# Altium PCB zb_hub.PcbDoc
Units mil, origin at the board's own origin, x right, y up, seen from the top; angles counter-clockwise.
Board outline 3850 x 3025 mil, 2 copper layers (Top Layer, Bottom Layer); 24 components, 15 nets, 284 pads, 0 vias.
Unrouted connection lines stored in the file: 4.
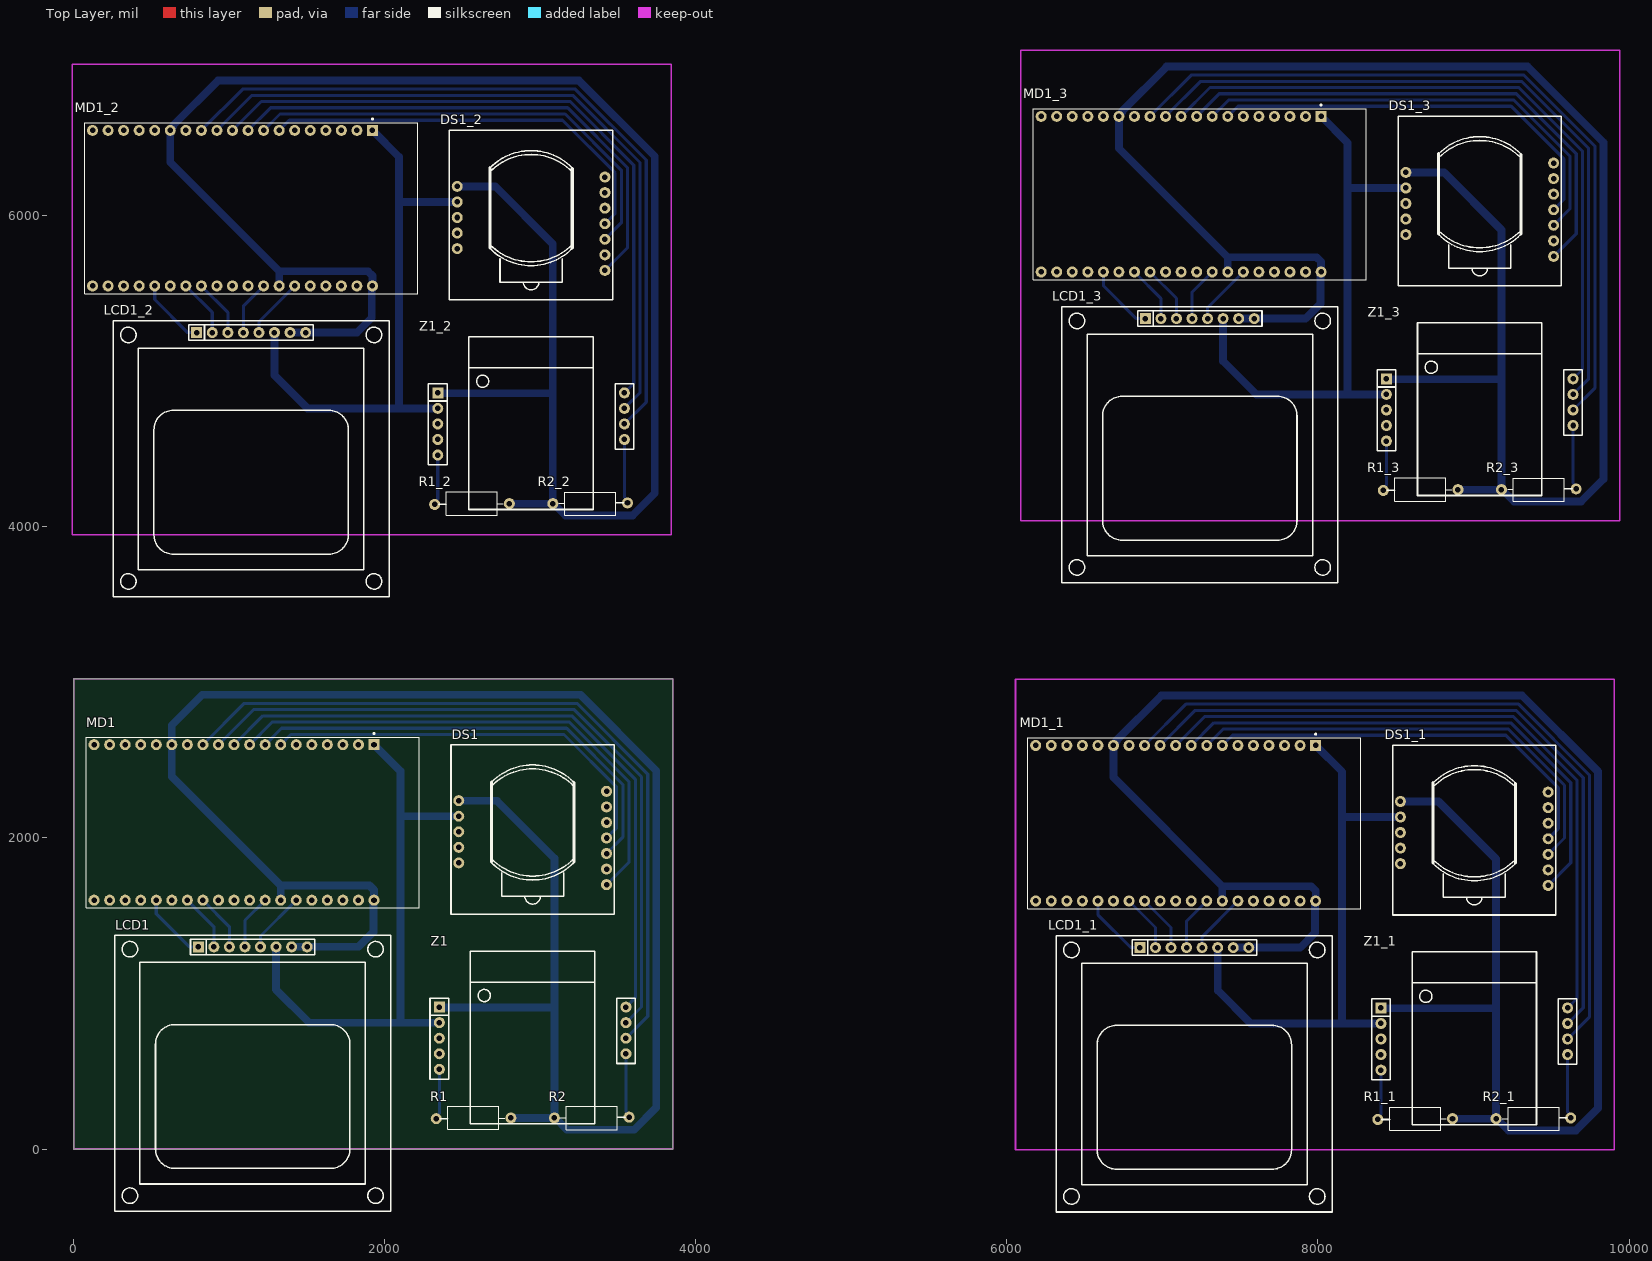
[diagram p0: Top Layer view]
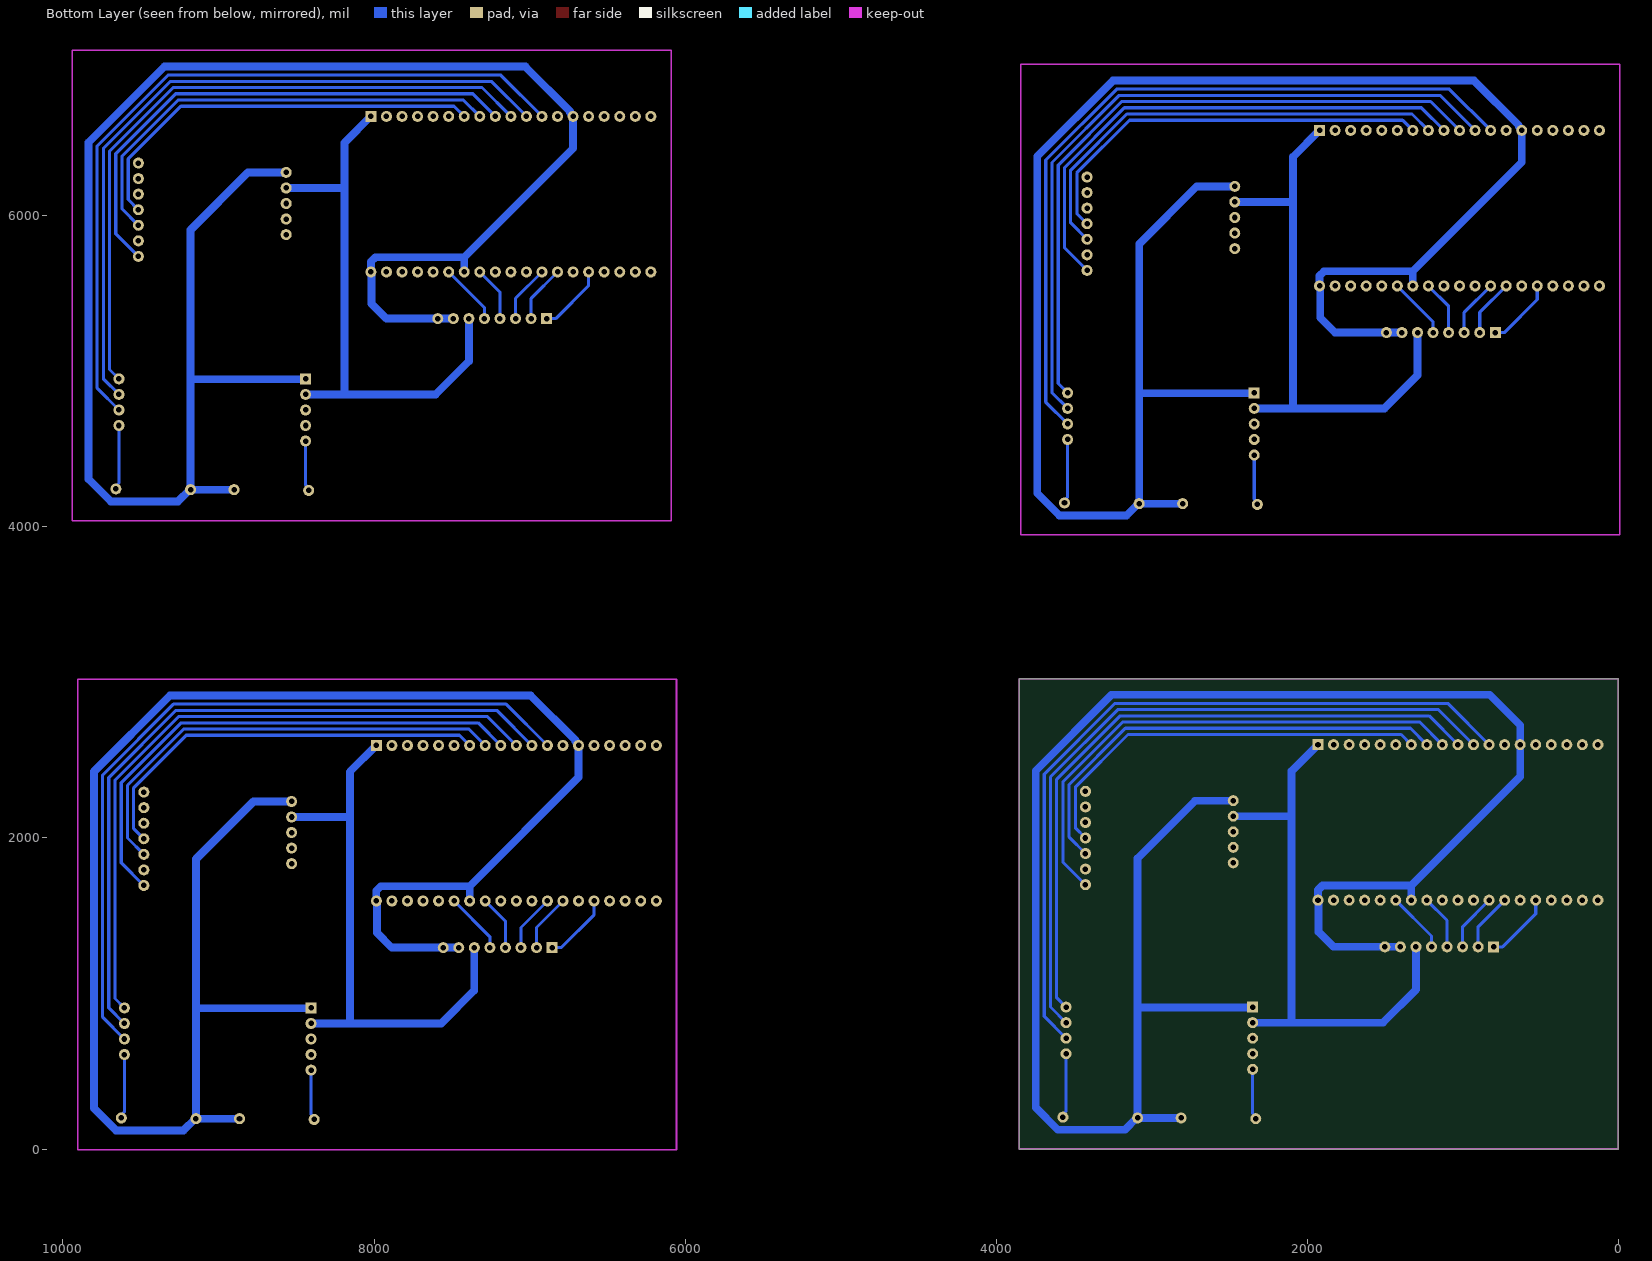
[diagram p1: Bottom Layer view, seen from below]

## Layer stack, top to bottom
Top Solder: solder mask 0.4, Solder Resist, Dk 3.5
Top Layer: signal copper 1.4
Dielectric 1: dielectric 12.6, FR-4, Dk 4.8
Bottom Layer: signal copper 1.4
Bottom Solder: solder mask 0.4, Solder Resist, Dk 3.5

## Board outline
0,0 0,3025 3850,3025 3850,0

## Design rules (kind name [scope] priority, off if disabled: settings)
Clearance [All] p1: gap=20 ignorepadtopadclearanceinfootprint=TRUE
ComponentClearance [All] p1: gap=0 collisioncheckmode=3 verticalgap=0 showdistances=FALSE
HoleSize [All] p1: absolutevalues=TRUE maxlimit=150 minlimit=1 maxpercent=80.000 minpercent=20.000
MinimumSolderMaskSliver [All] p1: minsoldermaskwidth=1
PolygonConnect [All] p1: connectstyle=Relief reliefconductorwidth=10 reliefentries=4 polygonreliefangle="90 Angle" airgapwidth=10
RoutingVias [All] p1: holewidth=10 width=20 viastyle="Through Hole" minholewidth=5 minwidth=10 maxholewidth=20 maxwidth=50
SilkToSilkClearance [All] p1: silktosilkclearance=5
SilkToSolderMaskClearance [IsPad] p1: minsilkscreentomaskgap=5 clearancetoexposedcopper=TRUE
SolderMaskExpansion [All] p1: expansion=4 istentingtop=FALSE
Width [All] p1: maxlimit=50 minlimit=10 preferedwidth=20
25 further rules are at their usual default settings.

## Classes and differential pairs
component class zb_hub: DS1 LCD1 MD1 R1 R2 Z1

## Components (designator, comment, footprint, x,y, rotation, side; value= is the part's Value field where it differs from the comment)
DS1 "DS1307" DS1307 2950,2000 r180 top
DS1_1 "DS1307" DS1307 9005,1995 r180 top (schematic designator DS1)
DS1_2 "DS1307" DS1307 2940,5950 r180 top (schematic designator DS1)
DS1_3 "DS1307" DS1307 9040,6040 r180 top (schematic designator DS1)
LCD1 "LCD5110" LCD5110 1150,1300 r0 top
LCD1_1 "LCD5110" LCD5110 7205,1295 r0 top (schematic designator LCD1)
LCD1_2 "LCD5110" LCD5110 1140,5250 r0 top (schematic designator LCD1)
LCD1_3 "LCD5110" LCD5110 7240,5340 r0 top (schematic designator LCD1)
MD1 "ESP32-DevKitC V4" FP-ESP32-DevKitC_V4-MFG 1150,2100 r270 top
MD1_1 "ESP32-DevKitC V4" FP-ESP32-DevKitC_V4-MFG 7205,2095 r270 top (schematic designator MD1)
MD1_2 "ESP32-DevKitC V4" FP-ESP32-DevKitC_V4-MFG 1140,6050 r270 top (schematic designator MD1)
MD1_3 "ESP32-DevKitC V4" FP-ESP32-DevKitC_V4-MFG 7240,6140 r270 top (schematic designator MD1)
R1 "10K" RES-1/2W 2550,200 r0 top
R1_1 "10K" RES-1/2W 8605,195 r0 top (schematic designator R1)
R1_2 "10K" RES-1/2W 2540,4150 r0 top (schematic designator R1)
R1_3 "10K" RES-1/2W 8640,4240 r0 top (schematic designator R1)
R2 "10K" RES-1/2W 3350,200 r180 top
R2_1 "10K" RES-1/2W 9405,195 r180 top (schematic designator R2)
R2_2 "10K" RES-1/2W 3340,4150 r180 top (schematic designator R2)
R2_3 "10K" RES-1/2W 9440,4240 r180 top (schematic designator R2)
Z1 "SZ1V5" "SZ1V5 PINOUT MODULE" 2950,600 r0 top
Z1_1 "SZ1V5" "SZ1V5 PINOUT MODULE" 9005,595 r0 top (schematic designator Z1)
Z1_2 "SZ1V5" "SZ1V5 PINOUT MODULE" 2940,4550 r0 top (schematic designator Z1)
Z1_3 "SZ1V5" "SZ1V5 PINOUT MODULE" 9040,4640 r0 top (schematic designator Z1)

## Footprints (in the part's own frame and the unit in brackets; to place one, negate y for a bottom-side part, rotate by r counter-clockwise, add the part's x,y. Pads: shape width x height; smd on the part's side, far side on the other; paste and mask are expansions set on the pad)
DS1307 [mm]
  round 1.8 hole 0.9: 1(-12.065,7.62) 2(-12.065,5.08) 2(12.065,4.064) 3(-12.065,2.54) 3(12.065,1.524) 4(-12.065,0) 4(12.065,-1.016) 5(-12.065,-2.54) 5(12.065,-3.556) 6(-12.065,-5.08) 6(12.065,-6.096) 7(-12.065,-7.62)
  silkscreen extent -13.34,-15.24 13.34,12.45
FP-ESP32-DevKitC_V4-MFG [mm]
  rect 1.8x1.8 hole 0.9 paste-1000 mask+0: 1(-12.7,19.81)
  round 1.8 hole 0.9 paste-1000 mask+0: 2(-12.7,17.27) 3(-12.7,14.73) 4(-12.7,12.19) 5(-12.7,9.65) 6(-12.7,7.11) 7(-12.7,4.57) 8(-12.7,2.03) 9(-12.7,-0.51) 10(-12.7,-3.05) 11(-12.7,-5.59) 12(-12.7,-8.13) 13(-12.7,-10.67) 14(-12.7,-13.21) 15(-12.7,-15.75) 16(-12.7,-18.29) 17(-12.7,-20.83) 18(-12.7,-23.37) 19(-12.7,-25.91) 20(12.7,-25.91) 21(12.7,-23.37) 22(12.7,-20.83) 23(12.7,-18.29) 24(12.7,-15.75) 25(12.7,-13.21) 26(12.7,-10.67) 27(12.7,-8.13) 28(12.7,-5.59) 29(12.7,-3.05) 30(12.7,-0.51) 31(12.7,2.03) 32(12.7,4.57) 33(12.7,7.11) 34(12.7,9.65) 35(12.7,12.19) 36(12.7,14.73) 37(12.7,17.27) 38(12.7,19.81)
  silkscreen extent -14.67,-27.2 13.95,27.2, body extent -14.05,-27.3 14.05,27.3, height 0.25
LCD5110 [mm]
  rect 1.8x1.8 hole 0.9: 1(-8.89,0)
  round 1.8 hole 0.9: 2(-6.35,0) 3(-3.81,0) 4(-1.27,0) 5(1.27,0) 6(3.81,0) 7(6.35,0) 8(8.89,0)
  silkscreen extent -22.54,-43.18 22.54,1.91
RES-1/2W [mm]
  round 1.8 hole 0.9: 1(-5.588,-0.127) 2(6.604,0)
  silkscreen extent -4.95,-1.87 5.61,1.91, body extent -5.84,-1.52 6.86,1.43, height 3.08
"SZ1V5 PINOUT MODULE" [mm]
  rect 1.8x1.8 hole 0.9: 1(-15.24,7.938)
  round 1.8 hole 0.9: 3(-15.24,5.397) 5(-15.24,2.857) 6(-15.24,0.318) 7(-15.24,-2.222) 13(15.24,7.938) 16(15.24,5.397) 17(15.24,2.857) 24(15.24,0.318)
  silkscreen extent -16.76,-11.11 16.76,17.08

## Part data
DS1 DS1_1 DS1_2 DS1_3: "Tiny RTC I2C module DS1307"
LCD1 LCD1_1 LCD1_2 LCD1_3: "IC Philips PCD8544. 3V~5V, 84×48 pixels"
MD1 MD1_1 MD1_2 MD1_3: library part CMP-194065-000004-1, "WiFi Development Tools (802.11) ESP32 General Development Kit, ESP32-WROOM-32 on the board", Manufacturer=Espressif, Max Frequency=2.5GHz, Max Supply Voltage=5V, Min Supply Voltage=2.7V, Temperature="-40°C to", Temperature Range Low=-40°C, Automotive=No, Bandwidth=2.4-2.5GHz, Category=UNK, ComponentLink2Description=Datasheet, ComponentLink2URL=https://docs.espressif.com/projects/esp-idf/en/latest/get-started/get-started-devkitc.html, Device Class L1="Integrated Circuits (ICs)", Device Class L2="RF Semiconductors and Devices", Device Class L3=Transceivers, Interface=I2C,SPI,UART,I2S, Lead Free=Yes, Manufacturer Part Number="ESP32-DevKitC V4", Number Of Adc Channels=16, Number Of Gpio=22, Octopart=https://octopart.com/esp32-devkitc+v4-espressif+systems-107467262, Package="ESP32-DevKitC V4", RoHS=TRUE
R1 R1_1 R1_2 R1_3 R2 R2_1 R2_2 R2_3: library part Res, "Res", Manufacturer="Generic Components", Class=Passive, Published=08/06/2000, Publisher="Altium Hobart Technology Centre", SubClass=R
Z1 Z1_1 Z1_2 Z1_3: library part SZ1V5_Alt

## Nets (pads, with @x,y where several pads share a name; then routed paths per layer and width w, separated by ;. In a path a pad name is that pad's centre, name@x,y a point inside that pad or via, vN(x,y) a via of type N, cw(c..) or ccw(c..) an arc to the next point about the centre after c; other vN are vias at no path point)
+3: DS1.5 LCD1.6 MD1.1 MD1.19 Z1.3 | length 3646
  Bottom Layer w50: LCD1.6 1300,1025 1512.5,812.5 2100,812.5 ; MD1.1 2100,2429.92 2100,2140 ; Z1.3 2100,812.5 ; DS1.5@2475,2140 2100,2140 ; 2100,812.5 2100,2140
GND: DS1.6 LCD1.7 LCD1.8 MD1.14 MD1.32 MD1.38 R1.2 R2.2 Z1.1 | length 12633.5
  Bottom Layer w50: MD1.32 1329.92,1695 ; LCD1.7 LCD1.8 1830,1300 1925.93,1395.93 1925.93,1596.01 MD1.38 1929.92,1665.71 1900.63,1695 1329.92,1695 ; Z1.1 2352.5,910 3090,910 ; DS1.6@2475,2240 2720,2240 3090,1870 3090,910 ; R1.2 R2.2 ; 1329.92,1695 629.92,2395 629.92,2724.92 825.43,2920.43 3257.73,2920.43 3745.43,2432.73 3745.43,266.68 3603.32,124.57 3170.74,124.57 3095.31,200 R2.2 ; R2.2 3090,910
LCD_CE: LCD1.2 MD1.26 | length 370.4
  Bottom Layer w20: MD1.26 900,1429.92 LCD1.2
LCD_DC: LCD1.3 MD1.27 | length 370.4
  Bottom Layer w20: MD1.27 1000,1429.92 LCD1.3
LCD_RST: LCD1.1 MD1.24 | length 445.6
  Bottom Layer w20: MD1.24 529.92,1512.52 742.44,1300 LCD1.1
MOSI: LCD1.4 MD1.31 | length 353.8
  Bottom Layer w20: LCD1.4 1100,1470.08 MD1.31
NetR1_1: R1.1 Z1.7 | length 325.8
  Bottom Layer w20: R1.1 2330,208.76 2350,228.76 Z1.7
NetR2_1: R2.1 Z1.24 | length 415.8
  Bottom Layer w20: Z1.24 3550,242.59 3570,222.59 R2.1
RTC_SCL: DS1.3 MD1.8 | length 2981.4
  Bottom Layer w20: MD1.8 1335.35,2705.43 3168.67,2705.43 3530.43,2343.67 3530.43,2005.43 DS1.3@3425,1900
RTC_SDA: DS1.4 MD1.7 | length 2682
  Bottom Layer w20: MD1.7 1395.35,2665.43 3152.1,2665.43 3490.43,2327.1 3490.43,2065.43 DS1.4@3425,2000
RTC_SQ: DS1.1 MD1.9 | length 3380.8
  Bottom Layer w20: MD1.9 1275.35,2745.43 3185.24,2745.43 3570.43,2360.24 3570.43,1845.43 DS1.1
SCLK: LCD1.5 MD1.33 | length 395.2
  Bottom Layer w20: LCD1.5 1200,1370.08 MD1.33
Z_RST: MD1.10 Z1.13 | length 4315.9
  Bottom Layer w20: MD1.10 1215.35,2785.43 3201.81,2785.43 3610.43,2376.81 3610.43,972.93 Z1.13
Z_RX: MD1.11 Z1.16 | length 4615.3
  Bottom Layer w20: MD1.11 1155.35,2825.43 3218.38,2825.43 3650.43,2393.38 3650.43,912.93 Z1.16
Z_TX: MD1.12 Z1.17 | length 4914.7
  Bottom Layer w20: MD1.12 1095.35,2865.43 3234.95,2865.43 3690.43,2409.95 3690.43,852.93 Z1.17
pads on no net: DS1.2 DS1.7 DS1_1.1 DS1_1.2 DS1_1.3 DS1_1.4 DS1_1.5 DS1_1.6 DS1_1.7 DS1_2.1 DS1_2.2 DS1_2.3 DS1_2.4 DS1_2.5 DS1_2.6 DS1_2.7 DS1_3.1 DS1_3.2 DS1_3.3 DS1_3.4 DS1_3.5 DS1_3.6 DS1_3.7 LCD1_1.1 LCD1_1.2 LCD1_1.3 LCD1_1.4 LCD1_1.5 LCD1_1.6 LCD1_1.7 LCD1_1.8 LCD1_2.1 LCD1_2.2 LCD1_2.3 LCD1_2.4 LCD1_2.5 LCD1_2.6 LCD1_2.7 LCD1_2.8 LCD1_3.1 LCD1_3.2 LCD1_3.3 LCD1_3.4 LCD1_3.5 LCD1_3.6 LCD1_3.7 LCD1_3.8 MD1.2 MD1.3 MD1.4 MD1.5 MD1.6 MD1.13 MD1.15 MD1.16 MD1.17 MD1.18 MD1.20 MD1.21 MD1.22 MD1.23 MD1.25 MD1.28 MD1.29 MD1.30 MD1.34 MD1.35 MD1.36 MD1.37 MD1_1.1 MD1_1.2 MD1_1.3 MD1_1.4 MD1_1.5 MD1_1.6 MD1_1.7 MD1_1.8 MD1_1.9 MD1_1.10 MD1_1.11 MD1_1.12 MD1_1.13 MD1_1.14 MD1_1.15 MD1_1.16 MD1_1.17 MD1_1.18 MD1_1.19 MD1_1.20 MD1_1.21 MD1_1.22 MD1_1.23 MD1_1.24 MD1_1.25 MD1_1.26 MD1_1.27 MD1_1.28 MD1_1.29 MD1_1.30 MD1_1.31 MD1_1.32 MD1_1.33 MD1_1.34 MD1_1.35 MD1_1.36 MD1_1.37 MD1_1.38 MD1_2.1 MD1_2.2 MD1_2.3 MD1_2.4 MD1_2.5 MD1_2.6 MD1_2.7 MD1_2.8 MD1_2.9 MD1_2.10 MD1_2.11 MD1_2.12 MD1_2.13 MD1_2.14 MD1_2.15 MD1_2.16 MD1_2.17 MD1_2.18 MD1_2.19 MD1_2.20 MD1_2.21 MD1_2.22 MD1_2.23 MD1_2.24 MD1_2.25 MD1_2.26 MD1_2.27 MD1_2.28 MD1_2.29 MD1_2.30 MD1_2.31 MD1_2.32 MD1_2.33 MD1_2.34 MD1_2.35 MD1_2.36 MD1_2.37 MD1_2.38 MD1_3.1 MD1_3.2 MD1_3.3 MD1_3.4 MD1_3.5 MD1_3.6 MD1_3.7 MD1_3.8 MD1_3.9 MD1_3.10 MD1_3.11 MD1_3.12 MD1_3.13 MD1_3.14 MD1_3.15 MD1_3.16 MD1_3.17 MD1_3.18 MD1_3.19 MD1_3.20 MD1_3.21 MD1_3.22 MD1_3.23 MD1_3.24 MD1_3.25 MD1_3.26 MD1_3.27 MD1_3.28 MD1_3.29 MD1_3.30 MD1_3.31 MD1_3.32 MD1_3.33 MD1_3.34 MD1_3.35 MD1_3.36 MD1_3.37 MD1_3.38 R1_1.1 R1_1.2 R1_2.1 R1_2.2 R1_3.1 R1_3.2 R2_1.1 R2_1.2 R2_2.1 R2_2.2 R2_3.1 R2_3.2 Z1.5 Z1.6 Z1_1.1 Z1_1.3 Z1_1.5 Z1_1.6 Z1_1.7 Z1_1.13 Z1_1.16 Z1_1.17 Z1_1.24 Z1_2.1 Z1_2.3 Z1_2.5 Z1_2.6 Z1_2.7 Z1_2.13 Z1_2.16 Z1_2.17 Z1_2.24 Z1_3.1 Z1_3.3 Z1_3.5 Z1_3.6 Z1_3.7 Z1_3.13 Z1_3.16 Z1_3.17 Z1_3.24
copper on no net: | length 125344.7
  Bottom Layer w20: 519.92,5550 519.92,5462.52 732.44,5250 790,5250 ; 719.92,5550 890,5379.92 890,5250 ; 819.92,5550 990,5379.92 990,5250 ; 819.92,6550 1085.35,6815.43 3224.95,6815.43 3680.43,6359.95 3680.43,4802.93 3540,4662.5 ; 919.92,6550 1145.35,6775.43 3208.38,6775.43 3640.43,6343.38 3640.43,4862.93 3540,4762.5 ; 1019.92,6550 1205.35,6735.43 3191.81,6735.43 3600.43,6326.81 3600.43,4922.93 3540,4862.5 ; 1090,5250 1090,5420.08 1219.92,5550 ; 1119.92,6550 1265.35,6695.43 3175.24,6695.43 3560.43,6310.24 3560.43,5795.43 3415,5650 ; 1190,5250 1190,5320.08 1419.92,5550 ; 1219.92,6550 1325.35,6655.43 3158.67,6655.43 3520.43,6293.67 3520.43,5955.43 3415,5850 ; 1319.92,6550 1385.35,6615.43 3142.1,6615.43 3480.43,6277.1 3480.43,6015.43 3415,5950 ; 2320,4145 2320,4158.76 2340,4178.76 2340,4462.5 ; 3540,4562.5 3540,4192.59 3560,4172.59 3560,4155 ; 6584.92,1595 6584.92,1507.52 6797.44,1295 6855,1295 ; 6619.92,5640 6619.92,5552.52 6832.44,5340 6890,5340 ; 6784.92,1595 6955,1424.92 6955,1295 ; 6819.92,5640 6990,5469.92 6990,5340 ; 6884.92,1595 7055,1424.92 7055,1295 ; 6884.92,2595 7150.35,2860.43 9289.95,2860.43 9745.43,2404.95 9745.43,847.93 9605,707.5 ; 6919.92,5640 7090,5469.92 7090,5340 ; 6919.92,6640 7185.35,6905.43 9324.95,6905.43 9780.43,6449.95 9780.43,4892.93 9640,4752.5 ; 6984.92,2595 7210.35,2820.43 9273.38,2820.43 9705.43,2388.38 9705.43,907.93 9605,807.5 ; 7019.92,6640 7245.35,6865.43 9308.38,6865.43 9740.43,6433.38 9740.43,4952.93 9640,4852.5 ; 7084.92,2595 7270.35,2780.43 9256.81,2780.43 9665.43,2371.81 9665.43,967.93 9605,907.5 ; 7119.92,6640 7305.35,6825.43 9291.81,6825.43 9700.43,6416.81 9700.43,5012.93 9640,4952.5 ; 7155,1295 7155,1465.08 7284.92,1595 ; 7184.92,2595 7330.35,2740.43 9240.24,2740.43 9625.43,2355.24 9625.43,1840.43 9480,1695 ; 7190,5340 7190,5510.08 7319.92,5640 ; 7219.92,6640 7365.35,6785.43 9275.24,6785.43 9660.43,6400.24 9660.43,5885.43 9515,5740 ; 7255,1295 7255,1365.08 7484.92,1595 ; 7284.92,2595 7390.35,2700.43 9223.67,2700.43 9585.43,2338.67 9585.43,2000.43 9480,1895 ; 7290,5340 7290,5410.08 7519.92,5640 ; 7319.92,6640 7425.35,6745.43 9258.67,6745.43 9620.43,6383.67 9620.43,6045.43 9515,5940 ; 7384.92,2595 7450.35,2660.43 9207.1,2660.43 9545.43,2322.1 9545.43,2060.43 9480,1995 ; 7419.92,6640 7485.35,6705.43 9242.1,6705.43 9580.43,6367.1 9580.43,6105.43 9515,6040 ; 8385,190 8385,203.76 8405,223.76 8405,507.5 ; 8420,4235 8420,4248.76 8440,4268.76 8440,4552.5 ; 9605,607.5 9605,237.59 9625,217.59 9625,200 ; 9640,4652.5 9640,4282.59 9660,4262.59 9660,4245
  Bottom Layer w50: 1290,5250 1290,4975 1502.5,4762.5 2090,4762.5 ; 1319.92,5550 1319.92,5645 ; 1390,5250 1490,5250 1820,5250 1915.93,5345.93 1915.93,5546.01 1919.92,5550 1919.92,5615.71 1890.63,5645 1319.92,5645 ; 1919.92,6550 2090,6379.92 2090,6090 ; 2340,4762.5 2090,4762.5 ; 2340,4862.5 2342.5,4860 3080,4860 ; 2465,6090 2090,6090 ; 2465,6190 2710,6190 3080,5820 3080,4860 ; 2800,4150 3080,4150 ; 7355,1295 7355,1020 7567.5,807.5 8155,807.5 ; 7384.92,1595 7384.92,1690 ; 7390,5340 7390,5065 7602.5,4852.5 8190,4852.5 ; 7419.92,5640 7419.92,5735 ; 7455,1295 7555,1295 7885,1295 7980.93,1390.93 7980.93,1591.01 7984.92,1595 7984.92,1660.71 7955.63,1690 7384.92,1690 ; 7490,5340 7590,5340 7920,5340 8015.93,5435.93 8015.93,5636.01 8019.92,5640 8019.92,5705.71 7990.63,5735 7419.92,5735 ; 7984.92,2595 8155,2424.92 8155,2135 ; 8019.92,6640 8190,6469.92 8190,6180 ; 8405,807.5 8155,807.5 ; 8405,907.5 8407.5,905 9145,905 ; 8440,4852.5 8190,4852.5 ; 8440,4952.5 8442.5,4950 9180,4950 ; 8530,2135 8155,2135 ; 8530,2235 8775,2235 9145,1865 9145,905 ; 8565,6180 8190,6180 ; 8565,6280 8810,6280 9180,5910 9180,4950 ; 8865,195 9145,195 ; 8900,4240 9180,4240 ; 1319.92,5645 619.92,6345 619.92,6555.65 639.49,6575.21 639.49,6583.32 926.6,6870.43 3247.73,6870.43 3735.43,6382.73 3735.43,4216.68 3593.32,4074.57 3160.74,4074.57 3085.31,4150 3080,4150 ; 2090,4762.5 2090,6090 ; 3080,4150 3080,4860 ; 7384.92,1690 6684.92,2390 6684.92,2600.65 6704.49,2620.21 6704.49,2628.32 6991.6,2915.43 9312.73,2915.43 9800.43,2427.73 9800.43,261.68 9658.32,119.57 9225.74,119.57 9150.31,195 9145,195 ; 7419.92,5735 6719.92,6435 6719.92,6645.65 6739.49,6665.21 6739.49,6673.32 7026.6,6960.43 9347.73,6960.43 9835.43,6472.73 9835.43,4306.68 9693.32,4164.57 9260.74,4164.57 9185.31,4240 9180,4240 ; 8155,807.5 8155,2135 ; 8190,4852.5 8190,6180 ; 9145,195 9145,905 ; 9180,4240 9180,4950

## Keep-outs
Keep-Out Layer:
  lines w10: -10,3950 3840,3950 3840,6975 -10,6975 -10,3950 ; 0,0 0,3025 3850,3025 3850,0 0,0 ; 6055,-5 9905,-5 9905,3020 6055,3020 6055,-5 ; 6090,4040 9940,4040 9940,7065 6090,7065 6090,4040